# Altium PCB PCB1.PcbDoc
Units mil, origin at the board's own origin, x right, y up, seen from the top; angles counter-clockwise.
Board outline 4000 x 4000 mil, 2 copper layers (Top Layer, Bottom Layer); 112 components, 87 nets, 367 pads, 0 vias.
Unrouted connection lines stored in the file: 266.
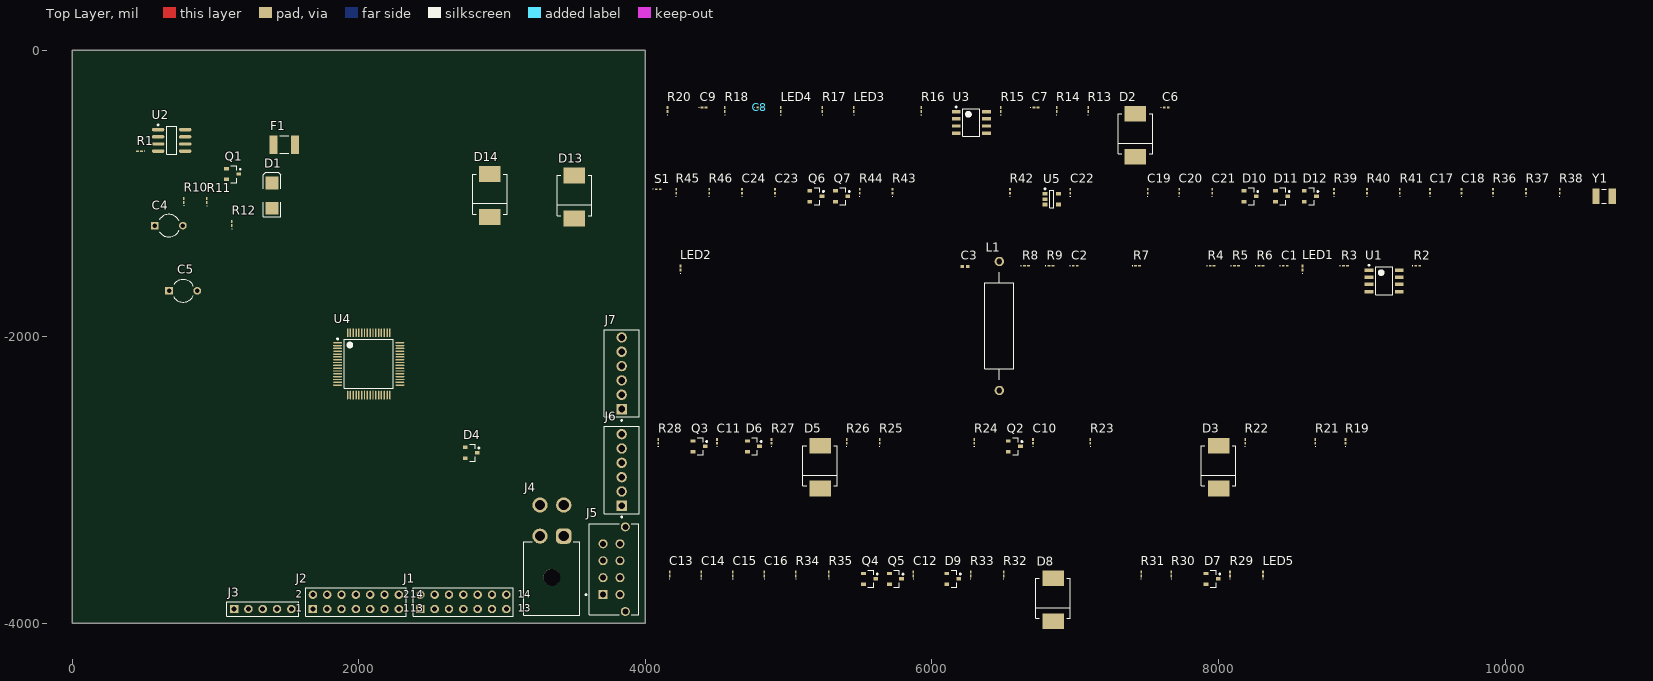
[diagram p0: Top Layer view]
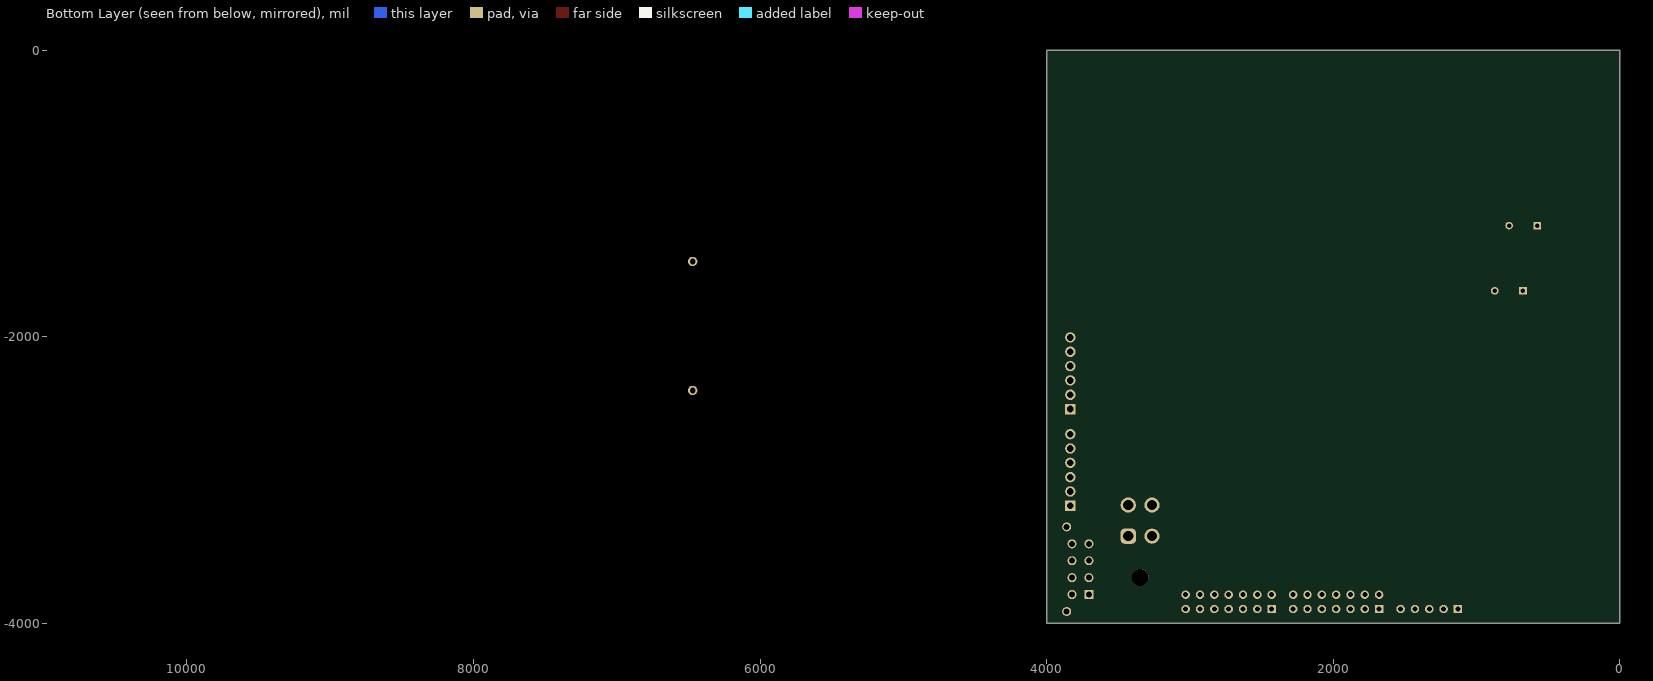
[diagram p1: Bottom Layer view, seen from below]

## Layer stack, top to bottom
Top Solder: solder mask 0.4, Solder Resist, Dk 3.5
Top Layer: signal copper 1.4
Dielectric 1: dielectric 12.6, FR-4, Dk 4.8
Bottom Layer: signal copper 1.4
Bottom Solder: solder mask 0.4, Solder Resist, Dk 3.5

## Board outline
0,-4000 4000,-4000 4000,0 0,0

## Design rules (kind name [scope] priority, off if disabled: settings)
Clearance [All] p1: gap=10 ignorepadtopadclearanceinfootprint=FALSE except(0: Arc-Hole Track-Hole SMDPad-Hole THPad-Hole Via-Hole Fill-Hole Poly-Hole Region-Hole Text-Hole)
PolygonConnect [All] p1: connectstyle=Relief reliefconductorwidth=10 reliefentries=4 polygonreliefangle="90 Angle" airgapwidth=10
RoutingVias [All] p1: holewidth=28 width=50 viastyle="Through Hole" minholewidth=28 minwidth=50 maxholewidth=28 maxwidth=50
SolderMaskExpansion [All] p1: expansion=4
Width [All] p1: maxlimit=10 minlimit=10 preferedwidth=10
30 further rules are at their usual default settings.

## Components (designator, comment, footprint, x,y, rotation, side; value= is the part's Value field where it differs from the comment)
C1 "100n" 0603 8465,-1505 r0 top
C2 "4n7" 0603 7000,-1505 r0 top value=100n
C3 "100n" 0402 6230,-1510 r0 top
C4 "10u/16" CAPR5-4X5 675,-1225 r0 top value=470u/16
C5 "100u/6V3" CAPR5-4X5 775,-1680 r0 top value=470u/16
C6 "100n" 0603 7635,-400 r0 top
C7 "100p" 0603 6725,-400 r0 top value=100pF
C8 "100n" 0603 4800,-400 r0 top
C9 "4n7" 0603 4410,-400 r0 top value=100n
C10 "100n" 0603 6705,-2730 r90 top
C11 "100n" 0603 4500,-2730 r90 top
C12 "100n" 0603 5870,-3655 r90 top
C13 "100n" 0603 4170,-3655 r90 top
C14 "100n" 0603 4390,-3655 r90 top
C15 "100n" 0603 4610,-3655 r90 top
C16 "100n" 0603 4830,-3655 r90 top
C17 "27p" 0603 9475,-985 r90 top value=100n
C18 "27p" 0603 9695,-985 r90 top value=100n
C19 "100n" 0603 7505,-985 r90 top
C20 "100n" 0603 7725,-985 r90 top
C21 "100n" 0603 7955,-985 r90 top
C22 "100n" 0603 6965,-985 r90 top
C23 "100n" 0603 4905,-985 r90 top
C24 "10n" 0603 4675,-985 r90 top value=100pF
D1 "P6SMB15A" SMB 1395,-1015 r90 top
D2 "LL5817" DIODE_SMC 7420,-595 r90 top
D3 "LL4148" DIODE_SMC 8000,-2910 r90 top
D4 "BAT54S" SOT23_L 2785,-2810 r0 top
D5 "LL4148" DIODE_SMC 5220,-2910 r90 top
D6 "BAT54S" SOT23_L 4755,-2765 r0 top
D7 "BAT54S" SOT23_L 7955,-3690 r0 top
D8 "LL4148" DIODE_SMC 6845,-3835 r90 top
D9 "BAT54S" SOT23_L 6145,-3690 r0 top
D10 "BAT54S" SOT23_L 8220,-1020 r0 top
D11 "BAT54S" SOT23_L 8440,-1020 r0 top
D12 "BAT54S" SOT23_L 8640,-1020 r0 top
D13 "LL4148" DIODE_SMC 3505,-1025 r90 top
D14 "LL4448" DIODE_SMC 2915,-1015 r90 top
F1 "Fuse 1" 1812 1480,-660 r180 top
J1 "Header 7X2" HDR2X7 2430,-3900 r0 top
J2 "Header 7X2" HDR2X7 1680,-3900 r0 top
J3 "ZL201" HDR1X5 1130,-3900 r0 top
J4 "649004227222" 649004227222 3347.68,-3686.81 r0 top
J5 "MX-43045-0800" MOLX-43045-0812_V 3782.56,-3622.17 r90 top
J6 "MX-43045-0600" FP-22-27-2061-MFG 3835,-2930 r90 top
J7 "MX-43045-0600" FP-22-27-2061-MFG 3835,-2255 r90 top
L1 "DL22-330" AXIAL-0.9 6470,-1925 r90 top value=100uH
LED1 "HCL-1904AYL" 0603 8585,-1520 r90 top
LED2 "HCL-1903BG4" 0603 4245,-1520 r90 top
LED3 "HCL-1906BR1" 0603 5455,-415 r90 top
LED4 "HCL-1904AYL" 0603 4945,-415 r90 top
LED5 "HCL-1906BR1" 0603 8310,-3655 r90 top
Q1 "BSS138" SOT23_L 1120,-865 r0 top
Q2 "BSS123" SOT23_L 6575,-2765 r0 top
Q3 "BSS123" SOT23_L 4375,-2765 r0 top
Q4 "BSS123" SOT23_L 5565,-3690 r0 top
Q5 "BSS123" SOT23_L 5745,-3690 r0 top
Q6 "BSS123" SOT23_L 5190,-1020 r0 top
Q7 "BSS123" SOT23_L 5370,-1020 r0 top
R1 "CAN0001" 0603 471.22,-705 r180 top
R2 "CAN0001" 0603 9390,-1505 r0 top
R3 "nc" 0603 8885,-1505 r0 top value=1K
R4 "1R" 0603 7955,-1505 r0 top value=1K
R5 "4k7" 0603 8125,-1505 r0 top value=1K
R6 "1k" 0603 8295,-1505 r0 top value=1K
R7 "3k6 1%" 0603 7435,-1505 r0 top value=1K
R8 "68" 0603 6660,-1505 r0 top value=1K
R9 "68" 0603 6830,-1505 r0 top value=1K
R10 "1M" 0603 780,-1048.78 r90 top value=1K
R11 "1k2 1%" 0603 940,-1050 r90 top value=1K
R12 "4k7" 0603 1115,-1210 r90 top value=1K
R13 "CAN0001" 0603 7090,-415 r90 top
R14 "CAN0001" 0603 6870,-415 r90 top
R15 "1k8" 0603 6480,-415 r90 top value=1K
R16 "nc" 0603 5925,-415 r90 top value=1K
R17 "4k7" 0603 5235,-415 r90 top value=1K
R18 "1k" 0603 4555,-415 r90 top value=1K
R19 "68" 0603 8885,-2730 r90 top value=1K
R20 "68" 0603 4155,-415 r90 top value=1K
R21 "10k" 0603 8675,-2730 r90 top value=1K
R22 "10k" 0603 8185,-2730 r90 top value=1K
R23 "1k" 0603 7105,-2730 r90 top value=1K
R24 "4k7" 0603 6295,-2730 r90 top value=1K
R25 "10k" 0603 5635,-2730 r90 top value=1K
R26 "10k" 0603 5405,-2730 r90 top value=1K
R27 "1k" 0603 4880,-2730 r90 top value=1K
R28 "4k7" 0603 4090,-2730 r90 top value=1K
R29 "10k" 0603 8080,-3655 r90 top value=1K
R30 "1k8" 0603 7670,-3655 r90 top value=1K
R31 "10k" 0603 7460,-3655 r90 top value=1K
R32 "1k" 0603 6500,-3655 r90 top value=1K
R33 "nc" 0603 6270,-3655 r90 top value=1K
R34 "4k7" 0603 5050,-3655 r90 top value=1K
R35 "4k7" 0603 5280,-3655 r90 top value=1K
R36 "10k" 0603 9915,-985 r90 top value=1K
R37 "10k" 0603 10145,-985 r90 top value=1K
R38 "10k" 0603 10380,-985 r90 top value=1K
R39 "470" 0603 8805,-985 r90 top value=1K
R40 "1k" 0603 9035,-985 r90 top value=1K
R41 "1k" 0603 9265,-985 r90 top value=1K
R42 "4k7" 0603 6545,-985 r90 top value=1K
R43 "10k" 0603 5725,-985 r90 top value=1K
R44 "4k7" 0603 5495,-985 r90 top value=1K
R45 "4k7" 0603 4215,-985 r90 top value=1K
R46 "4k7" 0603 4445,-985 r90 top value=1K
S1 "DTSM32NB" 0603 4090,-970 r0 top
U1 "MCP2551-I/SN" MCHP-SN8_V 9155,-1610 r0 top
U2 "MC33063AD" SO8_N 695,-630 r0 top
U3 "MCP2551-I/SN" MCHP-SN8_V 6275,-505 r0 top
U4 "PIC30F5011" TQFP-PT64_L 2070,-2190 r0 top
U5 "MCP1320-46LT" SOT-23-OT5_L 6835,-1040 r0 top
Y1 "10MHz" C1210_N 10690,-1020 r0 top

## Footprints (in the part's own frame and the unit in brackets; to place one, negate y for a bottom-side part, rotate by r counter-clockwise, add the part's x,y. Pads: shape width x height; smd on the part's side, far side on the other; paste and mask are expansions set on the pad)
0402 [mm] "Chip Capacitor, Body 1.0x0.5mm, IPC High Density"
  rect 0.6x0.5 smd: 1(-0.5,0) 2(0.5,0)
  body extent -0.55,-0.3 0.55,0.3, height 1.3
0603 [mm] "Chip Inductor, Body 0.6x0.3mm, IPC High Density"
  rect 0.5x0.3 smd: 1(-0.35,0) 2(0.35,0)
  silkscreen extent -0.9,-0.05 -0.9,0.05, body extent -0.33,-0.18 0.33,0.18, height 0.55
1812 [mm] "Chip Capacitor, Body 4.5x3.2mm, IPC High Density"
  rect 1.4x3.3 smd: 1(-1.9,0) 2(1.9,0)
  silkscreen extent -0.8,-1.55 0.8,1.55, body extent -2.4,-1.7 2.4,1.7, height 1.4
649004227222 [mm] "4.20mm Male Dual Row Angled Header with Mounting Pegs, 4p"
  rrect50% 2.7x2.7 hole 1.8: 1(2.1,7.5)
  round 2.7 hole 1.8: 2(-2.1,7.5) 3(2.1,13) 4(-2.1,13)
  round 3 hole 3 unplated: MH1(0,0.2)
  silkscreen extent -4.95,-6.53 4.95,6.53, body extent -4.8,-6.4 5.1,13.57, height 11.43
AXIAL-0.9 [mm] "Axial Device, Thru-Hole; 2 Leads; 0.9 in Pin Spacing"
  round 1.65 hole 1: 1(-11.43,0) 2(11.43,0)
  silkscreen extent -9.53,-2.54 9.53,2.54
C1210_N [mm] "Chip Capacitor, Body 3.2x2.5mm, IPC Medium Density"
  rect 1.3x2.7 smd: 1(-1.45,0) 2(1.45,0)
  silkscreen extent -0.4,-1.25 0.4,1.25, body extent -1.7,-1.35 1.7,1.35, height 1.5
CAPR5-4X5 [mm] "Capacitor; 2 Leads"
  rect 1.35x1.35 hole 0.8: 1(-2.5,0)
  round 1.35 hole 0.8: 2(2.5,0)
  silkscreen extent -1.69,-2 1.82,2
DIODE_SMC [mil] "Diode; 2 Leads"
  rect 110x150 smd: 1(-150,0) 2(150,0)
  silkscreen extent -130,-120 150,120
FP-22-27-2061-MFG [mm]
  rect 1.84x1.84 hole 1.19 paste-1000 mask+0: 1(-6.35,0)
  round 1.84 hole 1.19 paste-1000 mask+0: 2(-3.81,0) 3(-1.27,0) 4(1.27,0) 5(3.81,0) 6(6.35,0)
  silkscreen extent -8.47,-3.08 7.75,3.08, body extent -7.85,-3.18 7.85,3.17, height 0.25
HDR1X5 [mm] "Connector; Header; 5 Position"
  rect 1.5x1.5 hole 0.9: 1(0,0)
  round 1.5 hole 0.9: 2(2.54,0) 3(5.08,0) 4(7.62,0) 5(10.16,0)
  silkscreen extent -1.27,-1.27 11.43,1.27
HDR2X7 [mm] "Connector; Header; 7x2 Position"
  rect 1.5x1.5 hole 0.9: 1(0,0)
  round 1.5 hole 0.9: 2(0,2.54) 3(2.54,0) 4(2.54,2.54) 5(5.08,0) 6(5.08,2.54) 7(7.62,0) 8(7.62,2.54) 9(10.16,0) 10(10.16,2.54) 11(12.7,0) 12(12.7,2.54) 13(15.24,0) 14(15.24,2.54)
  silkscreen extent -1.27,-1.27 16.51,3.81
MCHP-SN8_V [mm] "SOIC, 8-Leads, Body 4.9x3.9mm, Pitch 1.27mm"
  rect 1.55x0.6 smd: 1(-2.7,1.905) 2(-2.7,0.635) 3(-2.7,-0.635) 4(-2.7,-1.905) 5(2.7,-1.905) 6(2.7,-0.635) 7(2.7,0.635) 8(2.7,1.905)
  silkscreen extent -2.82,-2.45 1.53,2.88, body extent -3,-2.45 3,2.45, height 1.75
MOLX-43045-0812_V [mm] "PCB Header, 8-Leads, Vertical, Pitch 3 mm, Mated Height 17.27 mm, Through Hole"
  rect 1.6x1.6 hole 1.07: 1(-4.5,1.97)
  round 1.6 hole 1.07: 2(-1.5,1.97) 3(1.5,1.97) 4(4.5,1.97) 5(-4.5,-1.03) 6(-1.5,-1.03) 7(1.5,-1.03) 8(4.5,-1.03) MH1(-7.5,-1.97) MH2(7.5,-1.97)
  silkscreen extent -8.08,-4.33 8.08,5.11, body extent -8.08,-4.33 8.08,4.44, height 9.91
SMB [mm] "DO-214-AA/SMB; 2 C-Bend Leads; Body 5.3 x 3.6 mm, inc. leads (LxW)"
  rect 2.3x2.3 smd: 1(-2.25,0) 2(2.25,0)
  silkscreen extent -3.8,-1.55 4.1,1.55
SO8_N [mm] "SOIC, 8-Leads, Body 4.9x3.9mm, Pitch 1.27mm, IPC Medium Density"
  oval 2.2x0.6 smd: 1(-2.4,1.905) 2(-2.4,0.635) 3(-2.4,-0.635) 4(-2.4,-1.905) 5(2.4,-1.905) 6(2.4,-0.635) 7(2.4,0.635) 8(2.4,1.905)
  silkscreen extent -2.52,-2.5 0.9,2.88, body extent -2,-2.5 2,2.5, height 1.75
SOT23_L [mm] "SOT23, 3-Leads, Body 2.9x1.3mm, Pitch 0.95mm, Lead Span 2.3mm - Reverse Pinning, IPC High Density"
  rect 0.85x0.6 smd: 1(1.075,0) 2(-1.075,-0.95) 3(-1.075,0.95)
  silkscreen extent -0.3,-1.5 1.48,1.5, body extent -0.7,-1.5 0.7,1.5, height 1.1
SOT-23-OT5_L [mm] "SOT23, 5-Leads, Body 2.9x1.7mm, Pitch 0.95mm, Lead Span 2.8mm, IPC High Density"
  rect 0.9x0.65 smd: 1(-1.2,0.95) 2(-1.2,0) 3(-1.2,-0.95) 4(1.2,-0.95) 5(1.2,0.95)
  silkscreen extent -1.32,-1.55 0.35,1.95, body extent -0.9,-1.55 0.9,1.55, height 1.45
TQFP-PT64_L [mm] "Thin QFP, 64-Leads, Body 10x10mm, Pitch 0.5mm, IPC High Density"
  oval 1.55x0.25 smd: 1(-5.525,3.75) 2(-5.525,3.25) 3(-5.525,2.75) 4(-5.525,2.25) 5(-5.525,1.75) 6(-5.525,1.25) 7(-5.525,0.75) 8(-5.525,0.25) 9(-5.525,-0.25) 10(-5.525,-0.75) 11(-5.525,-1.25) 12(-5.525,-1.75) 13(-5.525,-2.25) 14(-5.525,-2.75) 15(-5.525,-3.25) 16(-5.525,-3.75) 33(5.525,-3.75) 34(5.525,-3.25) 35(5.525,-2.75) 36(5.525,-2.25) 37(5.525,-1.75) 38(5.525,-1.25) 39(5.525,-0.75) 40(5.525,-0.25) 41(5.525,0.25) 42(5.525,0.75) 43(5.525,1.25) 44(5.525,1.75) 45(5.525,2.25) 46(5.525,2.75) 47(5.525,3.25) 48(5.525,3.75)
  oval 0.25x1.55 smd: 17(-3.75,-5.525) 18(-3.25,-5.525) 19(-2.75,-5.525) 20(-2.25,-5.525) 21(-1.75,-5.525) 22(-1.25,-5.525) 23(-0.75,-5.525) 24(-0.25,-5.525) 25(0.25,-5.525) 26(0.75,-5.525) 27(1.25,-5.525) 28(1.75,-5.525) 29(2.25,-5.525) 30(2.75,-5.525) 31(3.25,-5.525) 32(3.75,-5.525) 49(3.75,5.525) 50(3.25,5.525) 51(2.75,5.525) 52(2.25,5.525) 53(1.75,5.525) 54(1.25,5.525) 55(0.75,5.525) 56(0.25,5.525) 57(-0.25,5.525) 58(-0.75,5.525) 59(-1.25,5.525) 60(-1.75,5.525) 61(-2.25,5.525) 62(-2.75,5.525) 63(-3.25,5.525) 64(-3.75,5.525)
  silkscreen extent -5.65,-4.35 4.35,4.55, body extent -5,-5 5,5, height 1.6

## Part data
C1 C2 C3 C6 C7 C8 C9 C10 C11 C12 C13 C14 C15 C16 C17 C18 C19 C20 C21 C22 C23 C24: library part Cap, "Capacitor", LatestRevisionDate=17-Jul-2002, LatestRevisionNote="Re-released for DXP Platform.", PackageReference=RAD-0.3, Published=8-Jun-2000, Publisher="Altium Limited"
C4 C5: library part "Cap Pol1", "Polarized Capacitor (Radial)", LatestRevisionDate=17-Jul-2002, LatestRevisionNote="Re-released for DXP Platform.", PackageReference=RB7.6-15, Published=8-Jun-2000, Publisher="Altium Limited"
D1: library part "D Zener", "Zener Diode", LatestRevisionDate=17-Jul-2002, LatestRevisionNote="Re-released for DXP Platform.", PackageReference=DIODE-0.7, Published=8-Jun-2000, Publisher="Altium Limited"
D2 D3 D5 D8 D13: library part 1N4148, "High Conductance Fast Diode", Code_JEDEC=DO-204-AH, ComponentLink1Description="Manufacturer Link", ComponentLink1URL=http://www.fairchildsemi.com/, ComponentLink2Description=Datasheet, ComponentLink2URL=http://www.fairchildsemi.com/ds/1N%2F1N4148.pdf, DatasheetDocument=1997, LatestRevisionDate=17-Jul-2002, LatestRevisionNote="Re-released for DXP Platform.", PackageReference=DO-35, Published=8-Jun-2000, Publisher="Altium Limited"
D4 D6 D7 D9 D10 D11 D12: "Schottky Barrier Double Diode", ComponentLink1Description="Manufacturer Link", ComponentLink1URL=http://www.semiconductors.philips.com/, ComponentLink2Description=Datasheet, ComponentLink2URL=http://www.semiconductors.philips.com/acrobat/datasheets/BAT54_SERIES_4.pdf, DatasheetVersion=4-Mar-2002, LatestRevisionDate=12-Dec-2006, LatestRevisionNote="IPC-7351 Footprint Added.", PackageDescription="3-Pin SOT-23 Package 0.95 mm Pitch, 2.3 mm Lead Span", PackageReference=SOT23, PackageVersion=May-1999, Published=17-Sep-2003, Publisher="Altium Limited"
D14: library part Diode, "Default Diode", PackageDocument=Sep-1996, Code_JEDEC=DO-214-AB, LatestRevisionDate=17-Jul-2002, LatestRevisionNote="Re-released for DXP Platform.", PackageReference=SMC, Published=8-Jun-2000, Publisher="Altium Limited"
F1: "Fuse", LatestRevisionDate=17-Jul-2002, LatestRevisionNote="Re-released for DXP Platform.", PackageReference=PIN-W2/E2.8, Published=8-Jun-2000, Publisher="Altium Limited"
J1 J2: "Header, 7-Pin, Dual row", LatestRevisionDate=17-Jul-2002, LatestRevisionNote="Re-released for DXP Platform.", Publisher="Altium Limited"
J3: library part CON5, "Connector"
J4: library part CMP-1502-00529-2, Color=White, Contact Resistance=10m?, Current Rating=8A, Flammability Rating="UL94 V-0", Insulation Resistance=1G?, Max Operating Temperature=105°C, Min Operating Temperature=-40°C, Operating Supply Voltage=600V, Connector Type="Male Pin, Socket", Contact Gender=Male, Contact Material=Copper, Contact Plating=Tin, Fastening Type=Ramp, Gender=Male, Height=12.8mm, Housing Material=Nylon, Insulation=Insulated, Lead Pitch=4.2mm, Length=9.6mm, Mount="Through Hole", NexarPartId=8917589, Number of Contacts=4, Number of Pins=4, Number of Positions=4, Number of Rows=2, Pitch=4.2mm, REACH SVHC=Unknown, RoHS=Compliant, Row Spacing=5.5118mm, Termination="Through Hole", Voltage Rating=600V, Width=9.7mm
J5: library part "Header 4X2A", "Header, 4-Pin, Dual row", LatestRevisionDate=17-Jul-2002, LatestRevisionNote="Re-released for DXP Platform.", Publisher="Altium Limited"
J6 J7: library part "Header 6", "Header, 6-Pin", LatestRevisionDate=17-Jul-2002, LatestRevisionNote="Re-released for DXP Platform.", Publisher="Altium Limited"
L1: library part "Inductor Iron", "Magnetic-Core Inductor", Published=24-Mar-1999, Publisher="Altium Limited", Revision="July-2002: Re-released for DXP Platform."
LED1 LED2 LED3 LED4 LED5: library part LED3, "Typical BLUE SiC LED", Published=8-Jun-2000, Publisher="Altium Limited", Revision 1="Jul-2002: Re-released for DXP Platform.", Revision 2="17-Dec-2003: PCB Footprint replaced."
Q1: "N-Channel Enhancement Mode Vertical DMOS FET", ComponentLink1Description="Manufacturer Link", ComponentLink1URL=http://www.zetex.com/, ComponentLink2Description=Datasheet, ComponentLink2URL=www.zetex.com/3.0/pdf/BSS138.pdf, DatasheetVersion=Mar-96, PackageDescription="SOT-23; 3 Leads; Body 3.1 x 2.5 mm, inc. leads (LxW max), Alternate Lead Configuration", PackageReference=SOT23, PackageVersion=1996, Published=17-Dec-2003, Publisher="Altium Limited"
Q2 Q3 Q4 Q5 Q6 Q7: "N-channel Enhancement Mode Vertical D-MOSFET", ComponentLink1Description="Manufacturer Link", ComponentLink1URL=http://www.semiconductors.philips.com/, ComponentLink2Description=Datasheet, ComponentLink2URL=http://www.semiconductors.philips.com/acrobat/datasheets/BSS123_3.pdf, DatasheetVersion=Apr-1995, LatestRevisionDate=12-Dec-2006, LatestRevisionNote="IPC-7351 Footprint Added.", PackageDescription="3-Pin SOT-23 Package 0.95 mm Pitch, 2.3 mm Lead Span", PackageReference=SOT23, PackageVersion=May-1999, Published=17-Sep-2003, Publisher="Altium Limited"
R1 R2 R13 R14: library part "Res Varistor", "Varistor (Voltage-Sensitive Resistor)", LatestRevisionDate=04-Mar-2005, LatestRevisionNote="PCB Footprint replaced.", PackageReference=6-0805, Published=24-Mar-1999, Publisher="Altium Limited"
R3 R4 R5 R6 R7 R8 R9 R10 R11 R12 R15 R16 R17 R18 R19 R20 R21 R22 R23 R24 R25 R26 R27 R28 R29 R30 R31 R32 R33 R34 R35 R36 R37 R38 R39 R40 R41 R42 R43 R44 R45 R46: library part Res2, "Resistor", LatestRevisionDate=17-Jul-2002, LatestRevisionNote="Re-released for DXP Platform.", PackageReference=AXIAL-0.4, Published=8-Jun-2000, Publisher="Altium Limited"
S1: library part PUSHB, "Switch PushButton"
U1 U3: "High Speed CAN Transceiver, 8-Pin Plastic SOIC, Industrial Grade", Code_JEDEC=MS-012, ComponentLink1Description="Manufacturer Link", ComponentLink1URL=http://www.microchip.com, ComponentLink2Description=Datasheet, ComponentLink2URL=http://ww1.microchip.com/downloads/en/DeviceDoc/21667d.pdf, DatasheetVersion=Nov-2003, LatestRevisionDate=13-Apr-2006, LatestRevisionNote="IPC-7351 Footprint Added.", PackageDescription="8-Pin Plastic Narrow Body Small Outline Integrated Circuit 1.27 mm Pitch", PackageReference=SOIC150-8, PackageVersion=Oct-2005, Published=6-Oct-2005, Publisher="Altium Limited"
U2: "DC-to-DC Converter Control Circuit", Code_IPC=SOIC127P600-8, Code_JEDEC=MS-012-AA, ComponentLink1Description="Manufacturer Link", ComponentLink1URL=http://www.onsemi.com/site/products/taxonomy/0,4438,503,00.html, ComponentLink2Description=Datasheet, ComponentLink2URL=http://www.onsemi.com/pub/Collateral/MC34063A-D.PDF, DatasheetVersion=1988, LatestRevisionDate=13-Apr-2006, LatestRevisionNote="IPC-7351 Footprint Added.", PackageDescription="8-Pin Small Outline Integrated Circuit 1.27 mm Pitch", PackageReference=751-02, Published=17-Jul-2002, Publisher="Altium Limited"
U4: "PIC30F5011 - Up"
U5: library part MCP1320
Y1: library part XTAL, "Crystal Oscillator", LatestRevisionDate=17-Jul-2002, LatestRevisionNote="Re-released for DXP Platform.", PackageReference=R38, Published=8-Jun-2000, Publisher="Altium Limited"

## Nets (pads, with @x,y where several pads share a name; then routed paths per layer and width w, separated by ;. In a path a pad name is that pad's centre, name@x,y a point inside that pad or via, vN(x,y) a via of type N, cw(c..) or ccw(c..) an arc to the next point about the centre after c; other vN are vias at no path point)
+5V: C1.1 C5.1 C6.1 C8.1 C13.1 C14.1 C15.1 C16.1 C22.1 D4.2 D6.2 D7.2 D9.2 D10.2 D11.2 D12.2 D13.2 D14.2 J1.2 J2.2 J2.4 J2.6 J3.2 J4.3 L1.2 LED1.1 LED2.1 LED3.1 LED5.1 R7.1 R22.1 R26.1 R31.1 R36.1 R37.1 R38.1 R42.1 R43.2 U1.3 U3.3 U4.10 U4.19 U4.26 U4.38 U4.57 U5.5
+12V: C3.1 C4.1 D1.2 F1.2 J5.5 R4.2 R10.1 R12.1 U2.6
+12VPWR: F1.1 J6.3 J7.3
ADC0: J1.4 U4.16
ADC1: J1.6 U4.15
ADC2: J1.8 U4.14
ADC3: J1.10 U4.13
ADC4: J1.12 U4.12
ButD: C10.1 D4.3 R22.2 R23.2 U4.23
ButD_IN: J5.2 R23.1
ButN: C11.1 D6.3 R26.2 R27.2 U4.22
ButN_IN: J5.3 R27.1
ButR: C12.1 D9.3 R31.2 R32.2 U4.21
ButR_IN: J5.4 R32.1
CAN_BMS_RX: U3.4 U4.58
CAN_BMS_TX: R17.2 U3.1 U4.59
CAN_BMSS_H: J7.1 R13.2 R20.1 U3.7
CAN_BMSS_L: J7.2 R14.1 R19.1 U3.6
CAN_MUX_RX: U1.4 U4.61
CAN_MUX_TX: R5.2 U1.1 U4.60
CAN_MUXED_H: J6.1 R1.2 R9.1 U1.7
CAN_MUXED_L: J6.2 R2.1 R8.1 U1.6
ChrgLED: Q6.3 R45.1 U4.29
ChrgLED_OUT: J7.6 Q6.1
FluidHeater: Q7.3 R46.1 U4.30
FluidHeater_OUT: J6.6 Q7.1
GND: C1.2 C2.1 C3.2 C4.2 C5.2 C6.2 C7.1 C8.2 C9.1 C10.2 C11.2 C12.2 C13.2 C14.2 C15.2 C16.2 C17.2 C18.2 C19.2 C20.2 C21.2 C22.2 C23.1 C24.1 D2.1 D4.1 D6.1 D7.1 D9.1 D10.1 D11.1 D12.1 J1.14 J2.12 J2.14 J3.3 J4.1 J5.1 LED4.2 Q1.2 Q2.2 Q3.2 Q4.2 Q5.2 Q6.2 Q7.2 R1.1 R2.2 R6.2 R11.1 R13.1 R14.2 R15.2 R18.2 R24.2 R28.2 R34.2 R35.2 R45.2 R46.2 S1.1 U1.2 U2.4 U3.2 U4.9 U4.20 U4.25 U4.41 U4.56 U5.2
GPIOC13: J2.3 U4.47
GPIOC14: J2.1 U4.48
GPIOD0: J2.5 U4.46
GPIOD1: J1.13 U4.49
GPIOD2: J1.11 U4.50
GPIOD3: J1.9 U4.51
GPIOD4: J1.7 U4.52
GPIOD5: J1.5 U4.53
GPIOD6: J1.3 U4.54
GPIOD7: J1.1 U4.55
GPIOD8: J2.13 U4.42
GPIOD9: J2.11 U4.43
GPIOD10: J2.9 U4.44
GPIOD11: J2.7 U4.45
GROUND: D1.1 J6.4 J7.4 Q1.1
ILUM: D7.3 J4.4 Q4.3 R34.1
IMP: C19.1 D10.3 R36.2 R39.2 U4.11
IMP_IN: J4.2 R39.1
IsFHerror: C21.1 D12.3 R38.2 R41.2 U4.32
IsFHerror_IN: J6.5 R41.1
IsHeating: C20.1 D11.3 R37.2 R40.2 U4.31
IsHeating_IN: J7.5 R40.1
LightD: Q2.3 R24.1 U4.24
LightD_OUT: D3.1 J5.6 Q2.1
LightN: Q3.3 R28.1 U4.27
LightN_OUT: D5.1 J5.7 Q3.1
LightR: Q5.3 R35.1 U4.28
LightR_OUT: D8.1 J5.8 Q5.1
MCLR: J3.1 R44.1 U4.7
NetC2_2: C2.2 R3.2 R8.2 R9.2
NetC7_2: C7.2 U2.3
NetC9_2: C9.2 R16.2 R19.2 R20.2
NetC17_1: C17.1 U4.39 Y1.2
NetC18_1: C18.1 U4.40 Y1.1
NetC24_2: C24.2 D14.1 R43.1 S1.2 U5.3
NetD2_2: D2.2 L1.1 U2.2
NetD3_2: D3.2 R21.2
NetD5_2: D5.2 R25.2
NetD8_2: D8.2 R29.2
NetLED1_2: LED1.2 R5.1
NetLED2_2: LED2.2 R15.1
NetLED3_2: LED3.2 R17.1
NetLED4_1: LED4.1 R12.2
NetLED5_2: LED5.2 R30.1
NetQ1_3: Q1.3 R10.2
NetQ4_1: Q4.1 R21.1 R25.1 R29.1
NetR3_1: R3.1 U1.5
NetR4_1: R4.1 U2.1 U2.7 U2.8
NetR6_1: R6.1 U1.8
NetR7_2: R7.2 R11.2 U2.5
NetR16_1: R16.1 U3.5
NetR18_1: R18.1 U3.8
NetR30_2: R30.2 U4.37
NetR33_2: R33.2 U4.8
PGC: J3.5 U4.17
PGD: J3.4 U4.18
RESET: C23.2 D13.1 R42.2 R44.2 U5.1
RX: J2.10 U4.34
TX: J2.8 U4.33
WDI: R33.1 U5.4
pads on no net: J4.MH1 J5.MH1 J5.MH2 U4.1 U4.2 U4.3 U4.4 U4.5 U4.6 U4.35 U4.36 U4.62 U4.63 U4.64

## Text inside footprints (layer, text, board x,y; h text height)
J1: Top Overlay "2" at 2310,-3820 h50; Top Overlay "1" at 2310,-3920 h50; Top Overlay "14" at 3110,-3820 h50; Top Overlay "13" at 3110,-3920 h50
J2: Top Overlay "2" at 1560,-3820 h50; Top Overlay "1" at 1560,-3920 h50; Top Overlay "14" at 2360,-3820 h50; Top Overlay "13" at 2360,-3920 h50